# Altium PCB CAN_BUS.PcbDoc
Units mil, origin at the board's own origin, x right, y up, seen from the top; angles counter-clockwise.
Board outline 2257.87 x 2000 mil, 2 copper layers (Top Layer, Bottom Layer); 26 components, 12 nets, 139 pads, 135 vias.
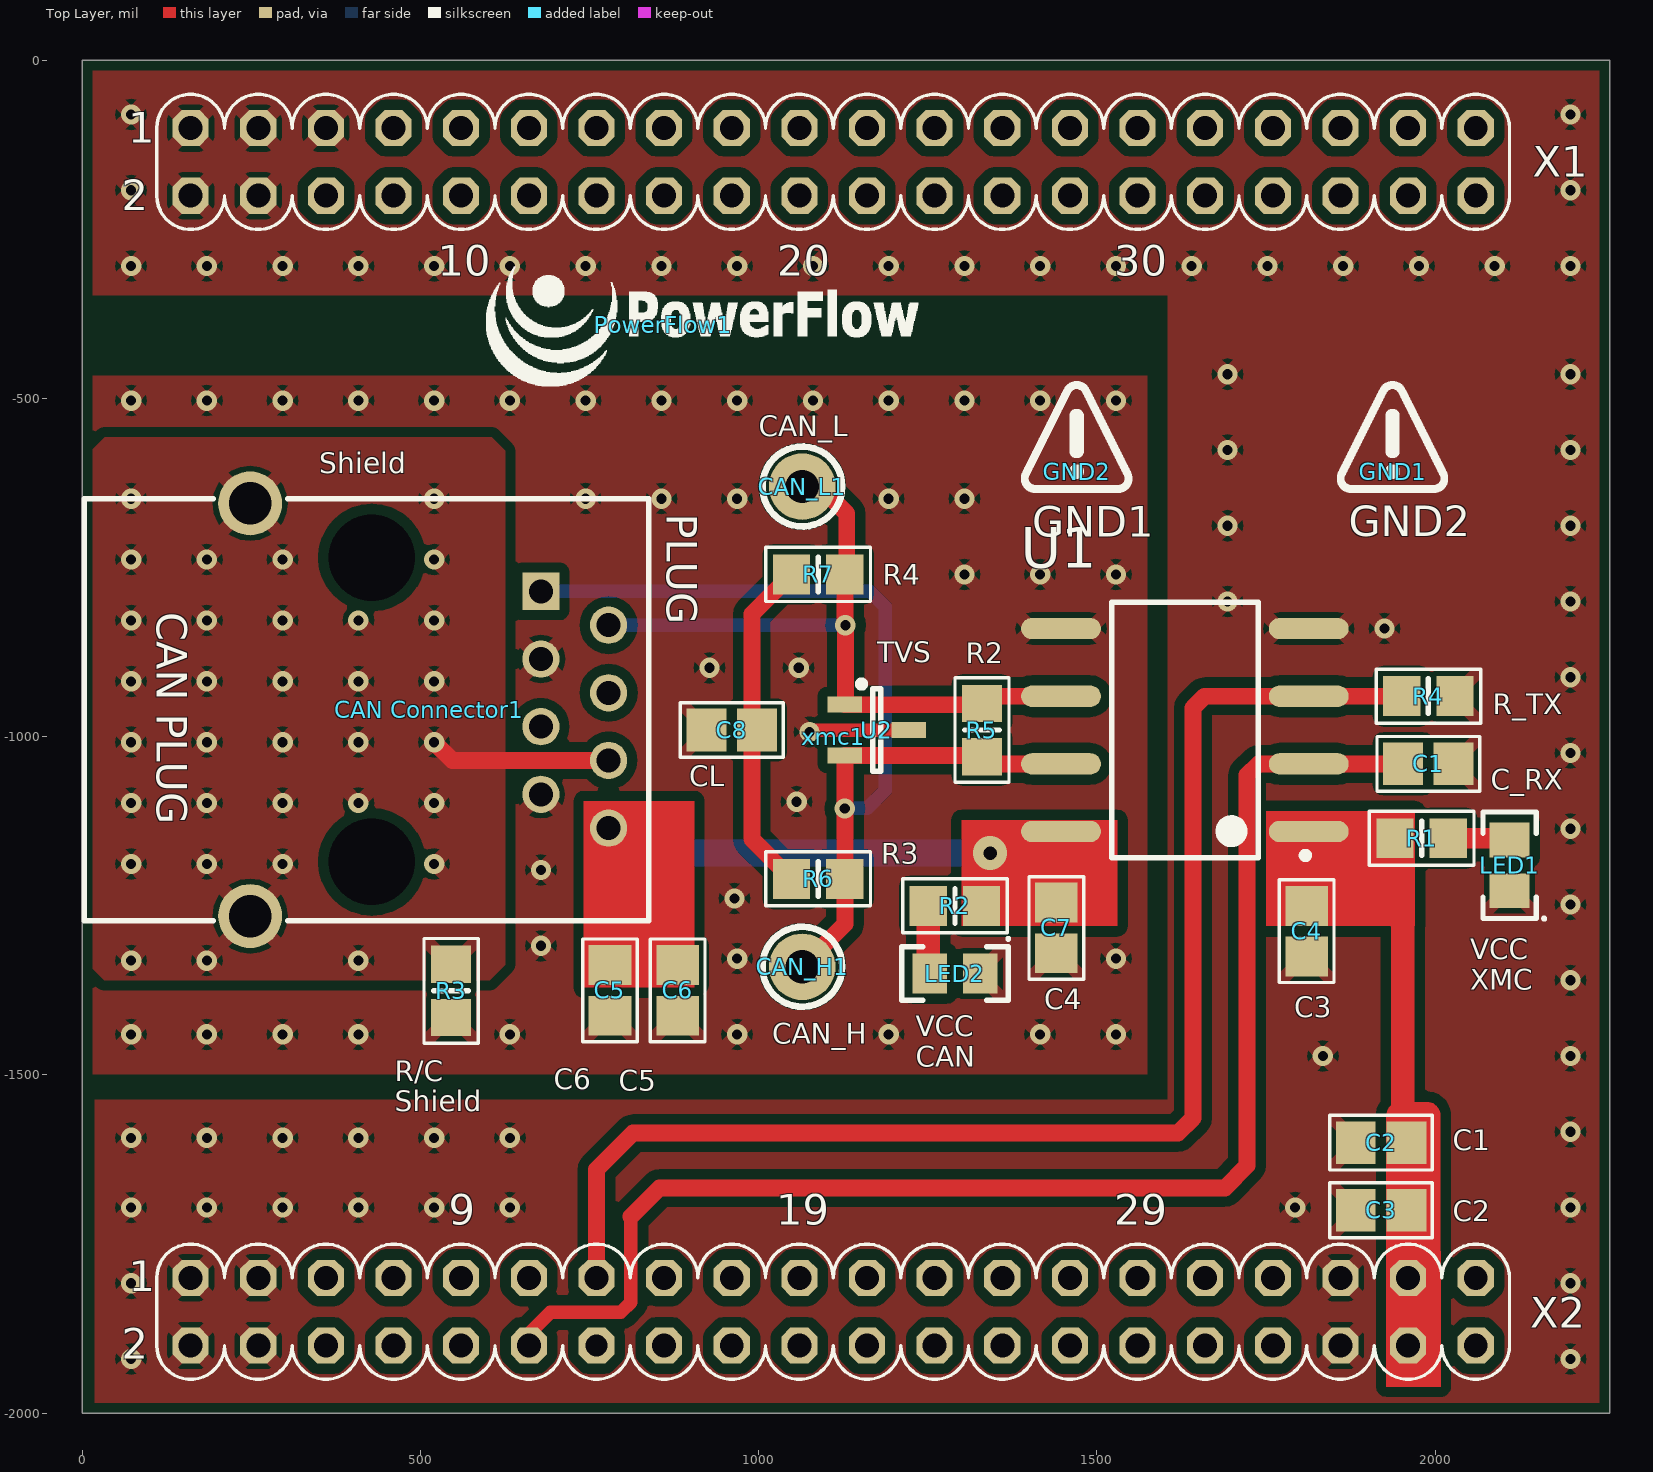
[diagram p0: Top Layer view]
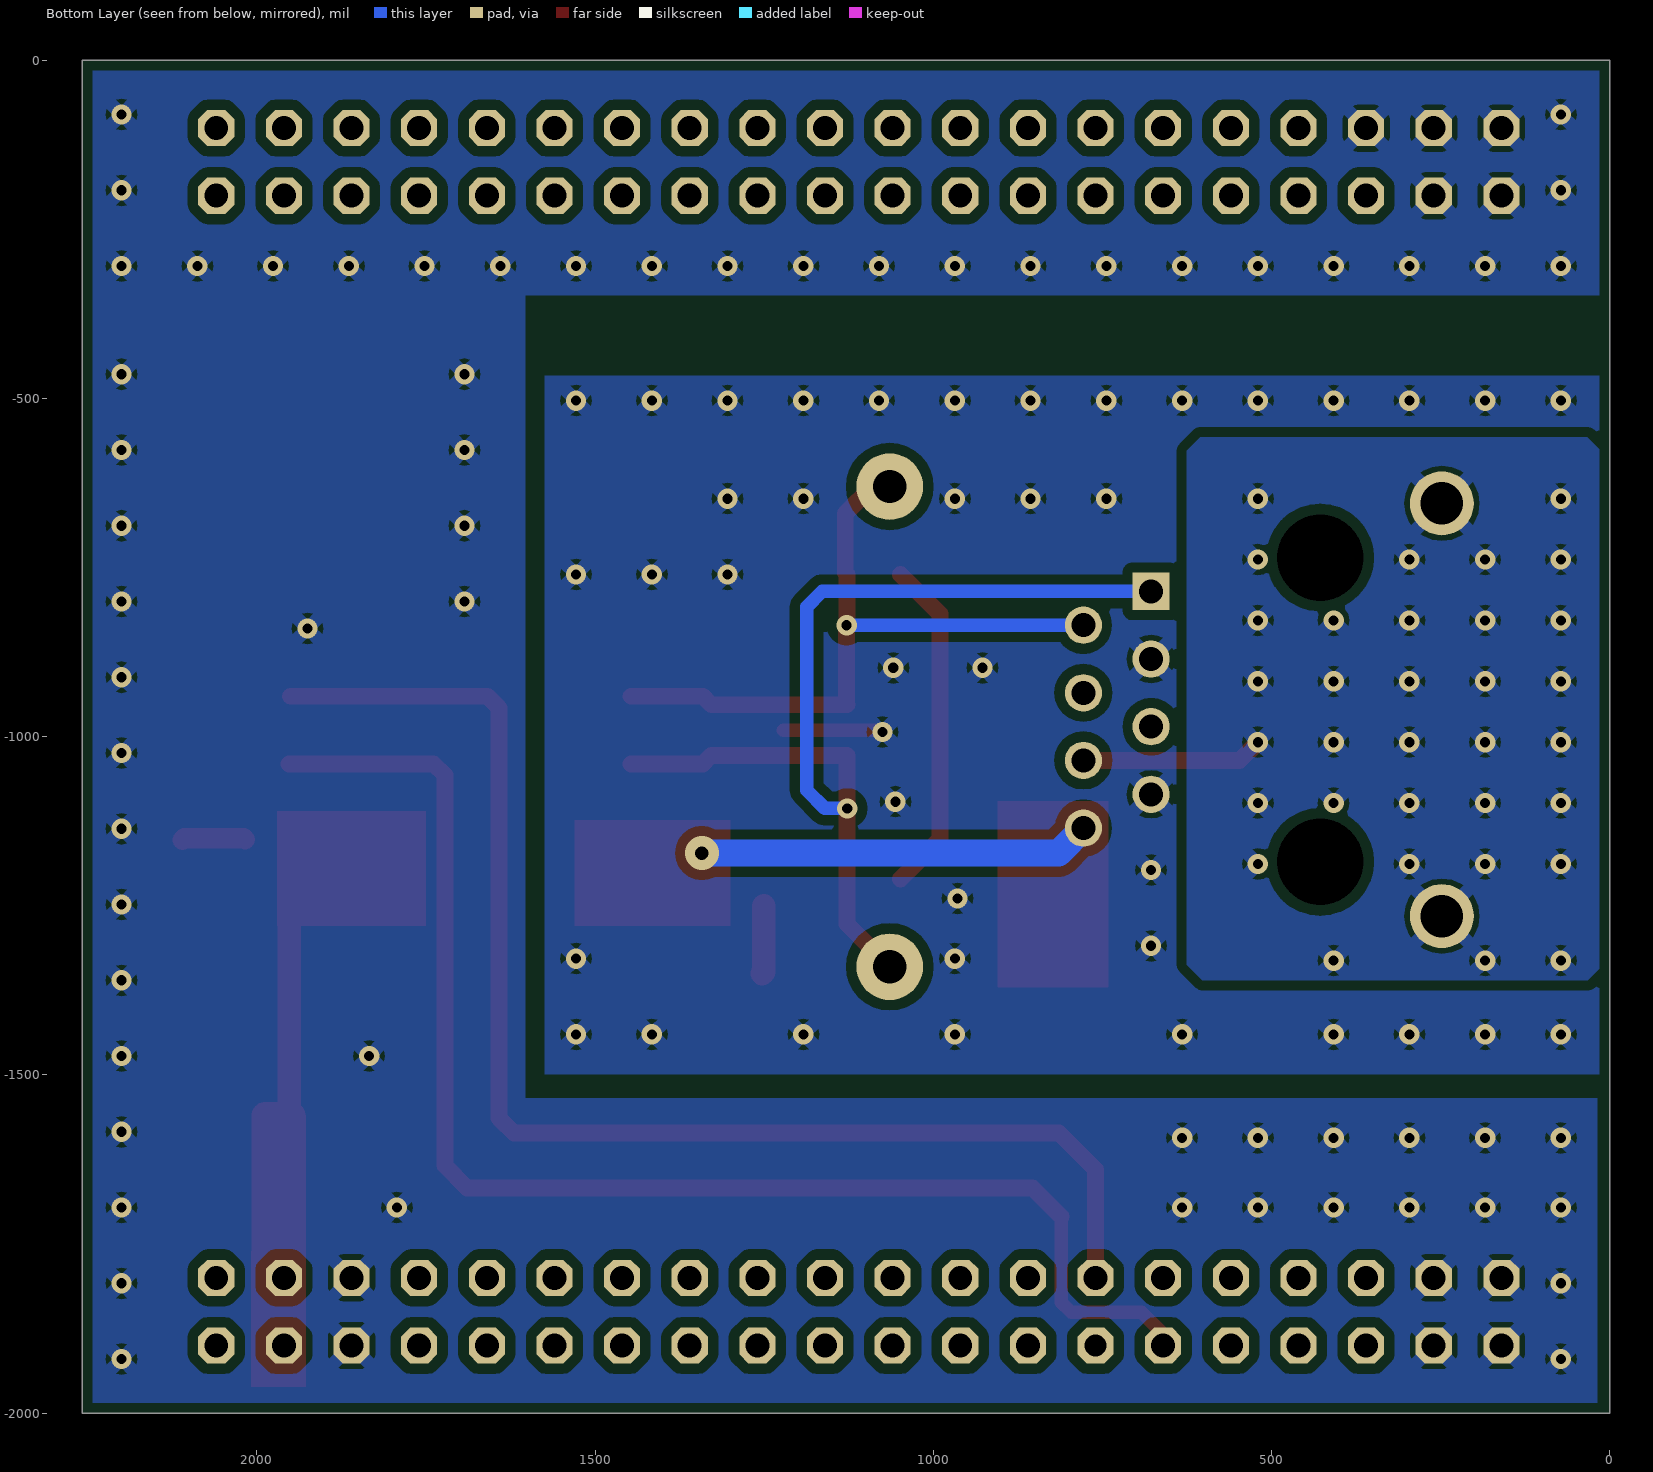
[diagram p1: Bottom Layer view, seen from below]

## Layer stack, top to bottom
Top Solder: solder mask 0.4, Solder Resist, Dk 3.5
Top Layer: signal copper 1.4
Dielectric 1: dielectric 12.6, FR-4, Dk 4.8
Bottom Layer: signal copper 1.4
Bottom Solder: solder mask 0.4, Solder Resist, Dk 3.5

## Board outline
0,-2000 0,0 2257.87,0 2257.87,-2000

## Design rules (kind name [scope] priority, off if disabled: settings)
BoardOutlineClearance [All] p1: gap=15 ignorepadtopadclearanceinfootprint=FALSE except(0: Arc-SplitContinuation Track-SplitContinuation SMDPad-SplitContinuation THPad-SplitContinuation Via-SplitContinuation Fill-SplitContinuation Poly-SplitContinuation Region-SplitContinuation Text-SplitContinuation)
Clearance Clearance-xPP-xTP-xTT [All] p1: gap=15 ignorepadtopadclearanceinfootprint=FALSE except(0: Arc-Hole Track-Hole SMDPad-Hole THPad-Hole Via-Hole Fill-Hole Poly-Hole Region-Hole Text-Hole)
ComponentClearance [All] p1: gap=9.84 collisioncheckmode=3 verticalgap=9.84 showdistances=FALSE
DiffPairsRouting [All] p1: maxlimit=9.84 minlimit=9.84 mostfreqgap=9.84 toplayer_minwidth=15 toplayer_maxwidth=15 toplayer_prefwidth=15 bottomlayer_minwidth=15 bottomlayer_maxwidth=15 bottomlayer_prefwidth=15 maxuncoupledlength=492.13
Height [All] p1: minheight=0 maxheight=984.25 prefheight=492.13
HoleSize HoleSize-PTH [All] p1: absolutevalues=TRUE maxlimit=236.22 minlimit=10 maxpercent=80.000 minpercent=20.000
HoleToHoleClearance [All] p1: gap=15 allowstackedmicrovias=TRUE
MinimumAnnularRing "Minimum IAR  >0.45mm" [((ObjectKind = 'Pad') OR (ObjectKind = 'Via')) And (Layer = 'MultiLayer') And (HoleDiameter > AsMM(0.45))] p1: minimumring=6.89 // minimum inner annular ring for pads > 0.45mm finished hole size
MinimumAnnularRing "Minimum IAR <=0.45mm" [((ObjectKind = 'Pad') OR (ObjectKind = 'Via')) And (Layer = 'MultiLayer') And (HoleDiameter <= AsMM(0.45))] p2: minimumring=6.89 // minimum inner annular ring for pads <= 0.45mm finished hole size
MinimumSolderMaskSliver [All] p1: minsoldermaskwidth=2
PlaneClearance PlaneClearance-IPI [All] p1: clearance=9.84
PlaneConnect [All] p1: planeconnectstyle=Relief reliefexpansion=25 reliefentries=4 reliefconductorwidth=25 reliefairgap=7.87
PolygonConnect PolygonConnect-xTW [All] p1: connectstyle=Relief reliefconductorwidth=19.68 reliefentries=4 polygonreliefangle="45 Angle" airgapwidth=7.87
RoutingCorners [All] p1: cornerstyle=45-Degree minsetback=98.43 maxsetback=98.43
RoutingVias "RoutingVias > 0.45mm" [(ObjectKind = 'Via') And (HoleDiameter > AsMM(0.45))] p1: holewidth=19.68 width=33.46 viastyle="Through Hole" minholewidth=10 minwidth=25 maxholewidth=35.43 maxwidth=55 // finishet hole size > 0.45mm
RoutingVias "RoutingVias <= 0.45mm" [(ObjectKind = 'Via') And (HoleDiameter <= AsMM(0.45))] p2: holewidth=11.81 width=25.59 viastyle="Through Hole" minholewidth=9.84 minwidth=23.62 maxholewidth=30 maxwidth=40 // finishet hole size <= 0.45mm
SilkToSilkClearance [All] p1: silktosilkclearance=5
SilkToSolderMaskClearance SilkscreenOverComponentPads [IsPad] p1: minsilkscreentomaskgap=2 clearancetoexposedcopper=TRUE
SolderMaskExpansion [All] p1: expansion=0
UnRoutedNet [All] p1: checkbadconnections=TRUE
Width Width-xTW [All] p1: maxlimit=59.06 minlimit=5.91 preferedwidth=20
18 further rules are at their usual default settings.

## Classes and differential pairs
component class CAN_BUS: C1 C2 C3 C4 C5 C6 C7 C8 "CAN Connector1" CAN_H1 CAN_L1 GND1 GND2 LED1 LED2 PowerFlow1 R1 R5 R6 R7 U1 U2 xmc1

## Components (designator, comment, footprint, x,y, rotation, side; value= is the part's Value field where it differs from the comment)
C1 "Capacitor" CAPC_0805 1990,-1040 r180 top value="15 pF"
C2 "Capacitor" CAPC_0805 1920,-1600 r0 top value=1u
C3 "Capacitor" CAPC_0805 1920,-1700 r0 top value="0.1 uF"
C4 "Capacitor" CAPC_0805 1810,-1287.4 r90 top value="0.01 uF"
C5 "Capacitor" CAPC_0805 780,-1375 r90 top value=1uF
C6 "Capacitor" CAPC_0805 880,-1375 r90 top value="0.1 uF"
C7 "Capacitor" CAPC_0805 1440,-1282.6 r90 top value="0.01 uF"
C8 "Capacitor" CAPC_0805 960,-990 r180 top value=N.A.
"CAN Connector1" "61500814221" 61500814221 420,-960 r270 top
CAN_H1 "testePoint" "PAD 2.5MM - FURO 1.25MM" 1064.25,-1340 r90 top
CAN_L1 "testePoint" "PAD 2.5MM - FURO 1.25MM" 1064.25,-630 r90 top
GND1 "Logotipo" Dangerous_Logo 1937,-608 r0 top
GND2 "Logotipo" Dangerous_Logo 1470,-608 r0 top
LED1 "Green" CD2012-0805 2110,-1190 r270 top
LED2 "Green" CD2012-0805 1290,-1350 r0 top
PowerFlow1 "Logotipo" PowerFlow_LOGO 859,-391 r0 top
R1 "220" RESC_0805 1980,-1150 r0 top
R2 "470" RESC_0805 1290,-1250 r180 top
R3 "N.A." RESC_0805 545,-1375.63 r90 top
R4 "49.9" RESC_0805 1990,-940 r0 top
R5 "N.A." RESC_0805 1330,-990 r90 top
R6 "N.A." RESC_0805 1087.87,-1210 r0 top
R7 "N.A." RESC_0805 1087.87,-760 r0 top
U1 "ISO1050DUBR" DUB8_M 1630,-990 r180 top
U2 "Diode_TVS_Array" SOT23-3 1174.49,-990 r0 top value=SM24CANB-02HTG
xmc1 "XMC" XMC4500_Relax_Lite 1560,-200 r0 top locked

## Footprints (in the part's own frame and the unit in brackets; to place one, negate y for a bottom-side part, rotate by r counter-clockwise, add the part's x,y. Pads: shape width x height; smd on the part's side, far side on the other; paste and mask are expansions set on the pad)
61500814221 [mm] "Modular Jack Horizontal Shielded 8P8C Tab Down"
  rect 1.4x1.4 hole 0.9: 1(-4.445,6.55)
  round 1.4 hole 0.9: 2(-3.175,9.09) 3(-1.905,6.55) 4(-0.635,9.09) 5(0.635,6.55) 6(1.905,9.09) 7(3.175,6.55) 8(4.445,9.09)
  round 3.15 hole 3.25 unplated: MH1(-5.715,0.2) MH2(5.715,0.2)
  round 2.4 hole 1.6: S1(-7.75,-4.37) S2(7.75,-4.37)
  silkscreen extent -7.92,-10.6 7.92,10.6, body extent -7.9,-10.6 7.9,10.6, height 13.7
CAPC_0805 [mm] "Chip Capacitor, Body 2.0x1.3mm, IPC Low Density"
  rect 1.5x1.6 smd: 1(-0.95,0) 2(0.95,0)
  silkscreen extent -1.93,-1.03 1.93,1.03, body extent -1.1,-0.72 1.1,0.72, height 1.1
CD2012-0805 [mm] "Chip Diode; Body 2.0 x 1.3 mm (LxW typ)"
  rect 1.3x1.5 smd: A(-0.95,0) C(0.95,0)
  silkscreen extent -2,-1 2.04,1.34, body extent -1.05,-0.67 1.05,0.68, height 0.9
Dangerous_Logo [mil] "Micro Logotipo 15x15mm"
  silkscreen extent -82,-30 82,133
DUB8_M [mm] "SOP, 8-Leads, Body 9.5x6.62mm, Pitch 2.54mm, IPC Low Density"
  oval 3x0.8 smd: 1(-4.65,3.81) 2(-4.65,1.27) 3(-4.65,-1.27) 4(-4.65,-3.81) 5(4.65,-3.81) 6(4.65,-1.27) 7(4.65,1.27) 8(4.65,3.81)
  silkscreen extent -4.65,-4.8 2.75,4.83, body extent -3.33,-4.77 3.33,4.77, height 4.85
"PAD 2.5MM - FURO 1.25MM" [mm]
  round 2.5 hole 1.25: 1(0,0)
  silkscreen extent -1.5,-1.5 1.5,1.5, body extent -1.27,-1.27 1.27,1.27, height 4.57
PowerFlow_LOGO [mil] "16.5 x 6.5 mm"
  silkscreen extent -262,-90 377,87
RESC_0805 [mm] "Chip Resistor, Body 2.0x1.3mm, IPC Low Density"
  rect 1.4x1.5 smd: 1(-1,0) 2(1,0)
  silkscreen extent -1.96,-1.01 1.96,1.01, body extent -1.07,-0.7 1.08,0.7, height 0.65
SOT23-3 [mm] "SOT23, 3"
  rect 1.3x0.6 smd mask+0.05: 1(-1.2,0.95) 2(-1.2,-0.95) 3(1.2,0)
  silkscreen extent -0.7,-1.55 0.15,1.85, body extent -1.32,-1.46 1.15,1.46, height 1
XMC4500_Relax_Lite [mil]
  oct 53.37x53.37 hole 35.43: X1.1(-1400,100) X1.2(-1400,0) X1.3(-1300,100) X1.4(-1300,0) X1.5(-1200,100) X1.6(-1200,0) X1.7(-1100,100) X1.8(-1100,0) X1.9(-1000,100) X1.10(-1000,0) X1.11(-900,100) X1.12(-900,0) X1.13(-800,100) X1.14(-800,0) X1.15(-700,100) X1.16(-700,0) X1.17(-600,100) X1.18(-600,0) X1.19(-500,100) X1.20(-500,0) X1.21(-400,100) X1.22(-400,0) X1.23(-300,100) X1.24(-300,0) X1.25(-200,100) X1.26(-200,0) X1.27(-100,100) X1.28(-100,0) X1.29(0,100) X1.30(0,0) X1.31(100,100) X1.32(100,0) X1.33(200,100) X1.34(200,0) X1.35(300,100) X1.36(300,0) X1.37(400,100) X1.38(400,0) X1.39(500,100) X1.40(500,0) X2.1(-1400,-1600) X2.2(-1400,-1700) X2.3(-1300,-1600) X2.4(-1300,-1700) X2.5(-1200,-1600) X2.6(-1200,-1700) X2.7(-1100,-1600) X2.8(-1100,-1700) X2.9(-1000,-1600) X2.10(-1000,-1700) X2.11(-900,-1600) X2.12(-900,-1700) X2.13(-800,-1600) X2.15(-700,-1600) X2.16(-700,-1700) X2.17(-600,-1600) X2.18(-600,-1700) X2.19(-500,-1600) X2.20(-500,-1700) X2.21(-400,-1600) X2.22(-400,-1700) X2.23(-300,-1600) X2.24(-300,-1700) X2.25(-200,-1600) X2.26(-200,-1700) X2.27(-100,-1600) X2.28(-100,-1700) X2.29(0,-1600) X2.30(0,-1700) X2.31(100,-1600) X2.32(100,-1700) X2.33(200,-1600) X2.34(200,-1700) X2.35(300,-1600) X2.36(300,-1700) X2.37(400,-1600) X2.38(400,-1700) X2.39(500,-1600) X2.40(500,-1700)
  oct 53.37x53.37 hole 32: X2.14(-800,-1700)
  silkscreen extent -1450,-1800 672,200

## Part data
C1: LCSC PART #=C1794
C2 C5: LCSC PART #=C28323
C3 C6: LCSC PART #=C49678
C4 C7: LCSC PART #=C1710
"CAN Connector1": "Modular Jack Horizontal Shielded 8P8C Tab Down WR-MJ", Rated Current="1.5 A", Withstanding Voltage="1000 VAC", Working Voltage="120 VAC", ComponentLink1Description=Manufacturer, ComponentLink1URL=http://www.we-online.de, ComponentLink2Description=Datasheet, ComponentLink2URL=http://katalog.we-online.com/em/datasheet/61500814221.pdf, Entrance=Horizontal, Part Number=61500814221, Pin Number=8P8C, Port=1x1, Published Date="September 2017", Publisher="Wurth Elektronik"
LED1 LED2: library part LED_GREEN, "LED 2X1.2MM 570NM GN WTR CLR SMD", LCSC PART #=C2297, Manufacturer=Kingbright, MPN=APT2012CGCK, Vendor=Digikey, VPN=754-1127-1-ND
R1: library part R2, "Thick film resistor, SMD 0402, 1/16W, 1%", LCSC PART #=C17557, Manufacturer=Generic
R2 R3 R5: library part R2, "Thick film resistor, SMD 0402, 1/16W, 1%", Manufacturer=Generic
R4: library part R2, "Thick film resistor, SMD 0402, 1/16W, 1%", LCSC PART #=C17720, Manufacturer=Generic
R6 R7: library part R2, "Thick film resistor, SMD 0402, 1/16W, 1%", LCSC PART #=C17802, Manufacturer=Generic
U1: "Isolated CAN Transceiver, -55 to 105 degC, 8-pin SOP (DUB), Green (RoHS & no Sb/Br)", LCSC PART #=C16428
U2: LCSC PART #=C151237

## Via types
v1: diameter 30, hole 15, Top Layer to Bottom Layer, 134 vias
v2: diameter 50, hole 20, Top Layer to Bottom Layer, 1 vias

## Nets (pads, with @x,y where several pads share a name; then routed paths per layer and width w, separated by ;. In a path a pad name is that pad's centre, name@x,y a point inside that pad or via, vN(x,y) a via of type N, cw(c..) or ccw(c..) an arc to the next point about the centre after c; other vN are vias at no path point)
3V3: C2.2 C3.2 C4.2 R1.1 U1.1 xmc1.X2.37 xmc1.X2.38 | length 460.6
  Top Layer w35: R1.1 1940.63,-1261.63 1952,-1273 1952,-1594.6 C2.2 C2.2@1960,-1597.4
5V2: "CAN Connector1.8" C5.2 C6.2 C7.2 R2.1 U1.8 | length 579.5
  Bottom Layer w40: 777.87,-1135 814.87,-1172 v2(1342,-1172)
CAN_H: "CAN Connector1.1" CAN_H1.1 R5.1 R6.2 U1.7 U2.2 | length 1524.4
  Top Layer w25: CAN_H1.1 1127.24,-1277.01 R6.2 U2.2 1328.03,-1027.4 R5.1 1340.63,-1040 U1.7
  Bottom Layer w20: 677.87,-785 1164,-785 1187,-808 1187,-1079 1160,-1106 v1(1127,-1106)
CAN_L: "CAN Connector1.2" CAN_L1.1 R5.2 R7.2 U1.6 U2.1 | length 1048.8
  Top Layer w25: CAN_L1.1 1090,-630 1130,-670 1130,-757.24 R7.2 1127.24,-834.24 v1(1128,-835) 1128,-951.84 U2.1 1328.03,-952.6 R5.2 1340.63,-940 U1.6
  Bottom Layer w20: 772.87,-840 777.87,-835 v1(1128,-835)
GND_DIG: C1.1 C2.1 C3.1 C4.1 LED1.C R4.2 U1.4 xmc1.X1.1 xmc1.X1.2 xmc1.X1.3 xmc1.X1.4 xmc1.X1.5 xmc1.X2.1 xmc1.X2.2 xmc1.X2.3 xmc1.X2.4 xmc1.X2.35 xmc1.X2.36
  other v1: 72,-1920 2200,-1920 72,-1808 2200,-1808 72,-1696 184,-1696 296,-1696 408,-1696 520,-1696 632,-1696 1793,-1696 2200,-1696 72,-1593 184,-1593 296,-1593 408,-1593 520,-1593 632,-1593 2200,-1584 1834,-1472 2200,-1472 2200,-1360 2200,-1248 2200,-1136 2200,-1024 2200,-912 1925,-840 1693,-800 2200,-800 1693,-688 2200,-688 1693,-576 2200,-576 1693,-464 2200,-464 72,-304 184,-304 296,-304 408,-304 520,-304 632,-304 744,-304 856,-304 968,-304 1080,-304 1192,-304 1304,-304 1416,-304 1528,-304 1640,-304 1752,-304 1864,-304 1976,-304 2088,-304 2200,-304 72,-192 2200,-192 72,-80 2200,-80
NetC8_1: C8.1 R6.1 R7.1 | length 498.5
  Top Layer w25: R6.1 990,-1151.5 990,-818.5 R7.1
NetLED1_A: LED1.A R1.2 | length 94.5
  Top Layer w30: R1.2@2017.4,-1151.97 R1.2 2107.4,-1150 LED1.A
NetLED2_A: LED2.A R2.2 | length 100.8
  Top Layer w35: R2.2 1250.63,-1348.03 LED2.A
RX_CAN: C1.2 U1.2 xmc1.X2.12 | length 2071.3
  Top Layer w20: xmc1.X2.12 660,-1883 692,-1851 796,-1851 811,-1836 811,-1709
  Top Layer w25: 811,-1709 853,-1667 1689,-1667 1722,-1634 1722,-1056.75 1738.75,-1040 U1.2 C1.2
SGND: "CAN Connector1.3" "CAN Connector1.7" C5.1 C6.1 C7.1 C8.2 LED2.C R3.1 U1.5 U2.3 | length 148
  Top Layer w20: v1(1075,-993) 1078,-990 U2.3
  other v1: 72,-1440 184,-1440 296,-1440 408,-1440 632,-1440 968,-1440 1192,-1440 1416,-1440 1528,-1440 968,-1328 1528,-1328 677.87,-1309 964,-1239 677.87,-1197 1056,-1096 927,-898 1059,-898 1304,-760 1416,-760 1528,-760 744,-648 856,-648 968,-648 1192,-648 1304,-648 72,-503 184,-503 296,-503 408,-503 520,-503 632,-503 744,-503 856,-503 968,-503 1080,-503 1192,-503 1304,-503 1416,-503 1528,-503
Shield: "CAN Connector1.6" "CAN Connector1.S1" "CAN Connector1.S2" R3.2 | length 269.1
  Top Layer w25: v1(520,-1008) 547,-1035 777.87,-1035
  other v1: 72,-1331 184,-1331 408,-1331 72,-1188 184,-1188 296,-1188 520,-1188 72,-1098 184,-1098 296,-1098 408,-1098 520,-1098 72,-1008 184,-1008 296,-1008 408,-1008 72,-918 184,-918 296,-918 408,-918 520,-918 72,-828 184,-828 296,-828 408,-828 520,-828 72,-738 184,-738 296,-738 520,-738 72,-648 520,-648
TX_CAN: R4.1 U1.3 xmc1.X2.13 | length 1996.2
  Top Layer w25: xmc1.X2.13 760,-1640 814,-1586 1620,-1586 1642,-1564 1642,-957 1659,-940 U1.3 R4.1
pads on no net: "CAN Connector1.4" "CAN Connector1.5" "CAN Connector1.MH1" "CAN Connector1.MH2" xmc1.X1.6 xmc1.X1.7 xmc1.X1.8 xmc1.X1.9 xmc1.X1.10 xmc1.X1.11 xmc1.X1.12 xmc1.X1.13 xmc1.X1.14 xmc1.X1.15 xmc1.X1.16 xmc1.X1.17 xmc1.X1.18 xmc1.X1.19 xmc1.X1.20 xmc1.X1.21 xmc1.X1.22 xmc1.X1.23 xmc1.X1.24 xmc1.X1.25 xmc1.X1.26 xmc1.X1.27 xmc1.X1.28 xmc1.X1.29 xmc1.X1.30 xmc1.X1.31 xmc1.X1.32 xmc1.X1.33 xmc1.X1.34 xmc1.X1.35 xmc1.X1.36 xmc1.X1.37 xmc1.X1.38 xmc1.X1.39 xmc1.X1.40 xmc1.X2.5 xmc1.X2.6 xmc1.X2.7 xmc1.X2.8 xmc1.X2.9 xmc1.X2.10 xmc1.X2.11 xmc1.X2.14 xmc1.X2.15 xmc1.X2.16 xmc1.X2.17 xmc1.X2.18 xmc1.X2.19 xmc1.X2.20 xmc1.X2.21 xmc1.X2.22 xmc1.X2.23 xmc1.X2.24 xmc1.X2.25 xmc1.X2.26 xmc1.X2.27 xmc1.X2.28 xmc1.X2.29 xmc1.X2.30 xmc1.X2.31 xmc1.X2.32 xmc1.X2.33 xmc1.X2.34 xmc1.X2.39 xmc1.X2.40

## Polygon pours and split planes (outlines as drawn)
Shield on Bottom Layer "Shield_BOT" (solid, remove dead copper, pour order 10): 32,-1360 12,-1340 12,-578 33,-557 605,-557 625,-577 625,-1069 625,-1337 602,-1360
SGND on Bottom Layer "S_GND_BOT" (solid, remove dead copper, pour order 14): 2,-1502 5,-1499 1574,-1499 1574,-466 -5,-466
GND_DIG on Bottom Layer "GND_DIG_L02_P018" (solid, remove dead copper, pour order 18): 18,-1534.47 18,-1998 2256,-1998 2258,-2000 2258,-2 1,-2 0,-3 0,-347 1603,-347 1603,-1533.53
Shield on Top Layer "Shield_TOP" (solid, remove dead copper, pour order 8): 32,-1360 12,-1340 12,-578 33,-557 605,-557 625,-577 625,-1069 625,-1337 602,-1360
SGND on Top Layer "SGND_L01_P012" (solid, remove dead copper, pour order 12): 2,-1502 5,-1499 1574,-1499 1574,-466 0,-466
GND_DIG on Top Layer "GND_DIG_L01_P016" (solid, remove dead copper, pour order 16): 18,-1536.64 18,-1998 2256,-1998 2258,-2000 2258,-2 1,-2 0,-3 0,-347 1605,-347 1605,-1535.7

## Other copper
Top Layer:
  rectangle net 5V2: 1300,-1280 1530,-1123
  rectangle net 3V3: 1750,-1280 1970,-1110
  rectangle net 5V2: 741,-1371 905,-1095
  region net 3V3: 1928,-1960.72 1928,-1560 cw(c1947.68,-1560) 1947.68,-1540.32 1988,-1540 cw(c1988,-1559.68) 2007.68,-1559.69 2008.01,-1960.72

## Silkscreen, mask and mechanical layers (free items; w line width, h text height)
Top Overlay:
  text "CAN_L" at 999.75,-556 h30
  text "Shield" at 350,-610 h30
  text "PLUG" at 864,-670 h45 r270
  text "GND2" at 1872.05,-703.36 h45
  text "GND1" at 1404,-704 h45
  text "R4" at 1183,-775 h30
  text "CAN PLUG" at 110,-816 h45 r270
  text "TVS" at 1175,-890 h30
  text "R2" at 1306,-891 h30
  text "R_TX" at 2085,-967 h30
  text "CL" at 897,-1073 h30
  text "C_RX" at 2082,-1078 h30
  text "R3" at 1181,-1188 h30
  text "VCC / XMC" at 2052,-1374 h30
  text "C4" at 1422,-1403 h30
  text "C3" at 1792,-1415 h30
  text "CAN_H" at 1020,-1454 h30
  text "VCC / CAN" at 1232,-1488 h30
  text "C6" at 697,-1521 h30
  text "C5" at 793,-1523 h30
  text "R/C / Shield" at 462,-1554 h30
  text "C1" at 2026,-1611 h30
  text "C2" at 2026,-1716 h30
Mechanical 1:
  the board outline again, w8

## Text inside footprints (layer, text, board x,y; h text height)
xmc1: Top Overlay "30" at 1525.55,-318.11 h45; Top Overlay "20" at 1027.52,-318.11 h45; Top Overlay "2" at 58.35,-1919.69 h45; Top Overlay "1" at 68.46,-1819.69 h45; Top Overlay "X2" at 2140.46,-1873.61 h45; Top Overlay "X1" at 2144.39,-171.83 h45; Top Overlay "9" at 541.5,-1721.26 h45; Top Overlay "19" at 1025.55,-1721.26 h45; Top Overlay "29" at 1525.55,-1721.26 h45; Top Overlay "1" at 67.48,-121.85 h45; Top Overlay "2" at 58.35,-221.85 h45; Top Overlay "10" at 525.55,-318.11 h45